# Altium PCB PCB.PCBDOC (part 2 of 3)
Units mil, origin at the board's own origin, x right, y up, seen from the top; angles counter-clockwise.
Board outline 2850 x 2710 mil, 2 copper layers (Top Layer, Bottom Layer); 25 components, 0 nets, 106 pads, 0 vias.
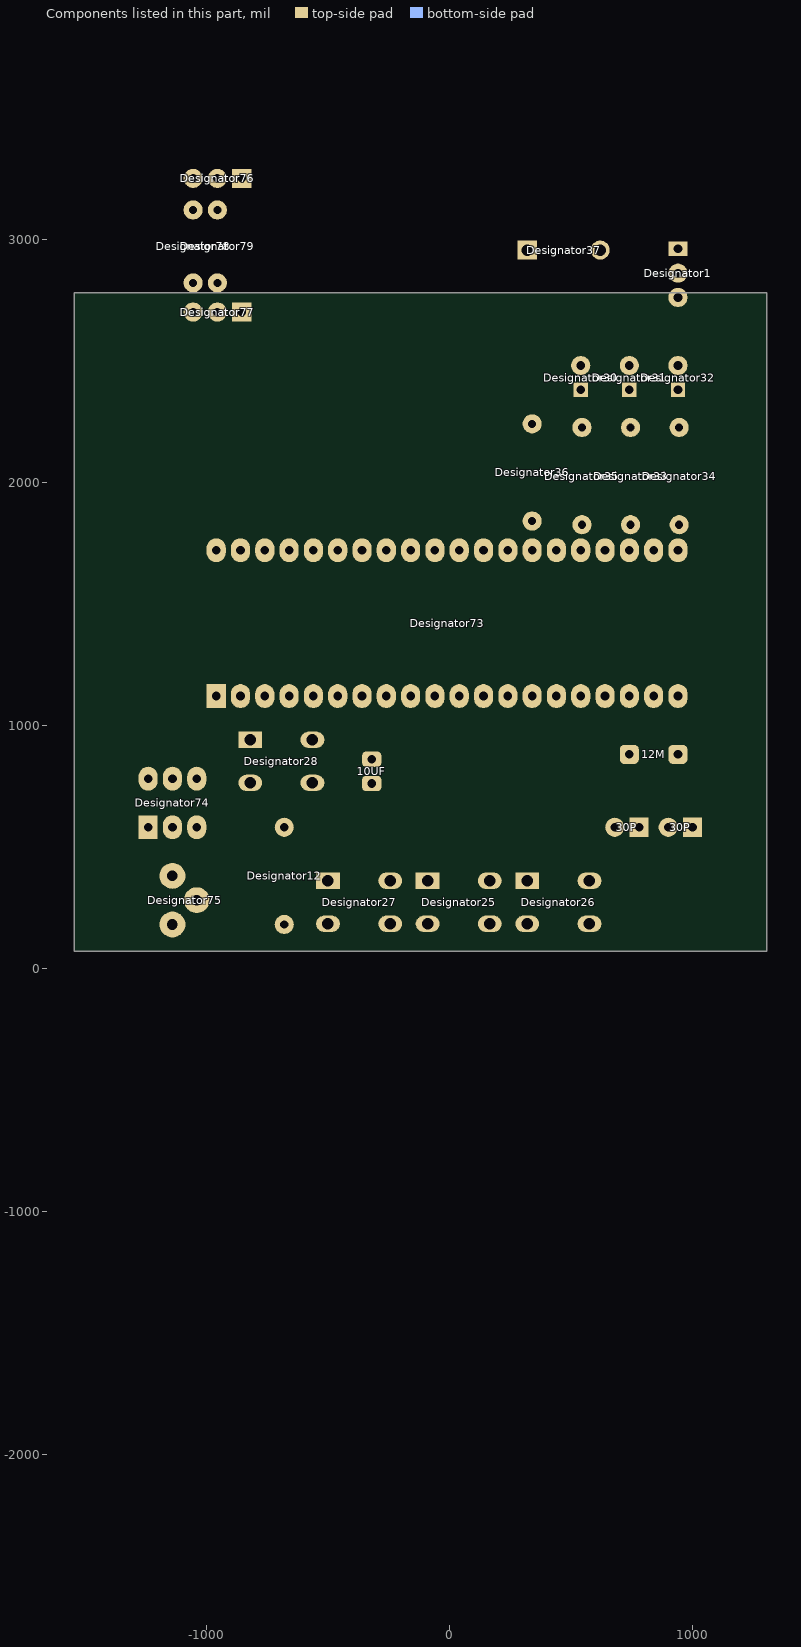
[diagram p2: the components of this part, seen from the top]

## Nets (pads, with @x,y where several pads share a name; then routed paths per layer and width w, separated by ;. In a path a pad name is that pad's centre, name@x,y a point inside that pad or via, vN(x,y) a via of type N, cw(c..) or ccw(c..) an arc to the next point about the centre after c; other vN are vias at no path point) (continued)
copper on no net: (continued)
  Bottom Layer w1: -182,-2566 -158,-2566 ; -181,-2567 -158,-2567 ; -181,-2565 -157,-2565 ; -180,-2568 -159,-2568 ; -180,-2564 -157,-2564 ; -180,-2563 -156,-2563 ; -179,-2569 -159,-2569 ; -179,-2562 -155,-2562 ; -178,-2570 -160,-2570 ; -178,-2561 -155,-2561 ; -177,-2571 -161,-2571 ; -177,-2560 -154,-2560 ; -177,-2559 -154,-2559 ; -176,-2572 -161,-2572 ; -176,-2558 -153,-2558 ; -175,-2573 -162,-2573 ; -175,-2557 -153,-2557 ; -175,-2556 -152,-2556 ; -174,-2575 -164,-2575 ; -174,-2574 -163,-2574 ; -174,-2555 -152,-2555 ; -173,-2576 -164,-2576 ; -173,-2554 -151,-2554 ; -173,-2553 -151,-2553 ; -172,-2577 -165,-2577 ; -172,-2552 -151,-2552 ; -172,-2551 -150,-2551 ; -171,-2578 -166,-2578 ; -171,-2550 -150,-2550 ; -171,-2549 -149,-2549 ; -170,-2580 -167,-2580 ; -170,-2579 -167,-2579 ; -170,-2548 -149,-2548 ; -170,-2547 -148,-2547 ; -169,-2581 -168,-2581 ; -169,-2546 -148,-2546 ; -169,-2545 -148,-2545 ; -168,-2544 -147,-2544 ; -168,-2543 -147,-2543 ; -167,-2542 -147,-2542 ; -167,-2541 -146,-2541 ; -166,-2540 -146,-2540 ; -166,-2539 -146,-2539 ; -166,-2538 -145,-2538 ; -165,-2537 -145,-2537 ; -165,-2536 -145,-2536 ; -165,-2535 -144,-2535 ; -164,-2534 -144,-2534 ; -164,-2533 -144,-2533 ; -163,-2532 -143,-2532 ; -163,-2531 -143,-2531 ; -163,-2530 -143,-2530 ; -163,-2529 -143,-2529 ; -162,-2528 -142,-2528 ; -162,-2527 -142,-2527 ; -162,-2526 -142,-2526 ; -161,-2525 -142,-2525 ; -161,-2524 -141,-2524 ; -161,-2523 -141,-2523 ; -161,-2522 -141,-2522 ; -160,-2521 -141,-2521 ; -160,-2520 -140,-2520 ; -160,-2519 -140,-2519 ; -160,-2518 -140,-2518 ; -159,-2517 -140,-2517 ; -159,-2516 -140,-2516 ; -159,-2515 -139,-2515 ; -159,-2514 -139,-2514 ; -159,-2513 -139,-2513 ; -158,-2512 -139,-2512 ; -158,-2511 -139,-2511 ; -158,-2510 -138,-2510 ; -158,-2509 -138,-2509 ; -158,-2508 -138,-2508 ; -157,-2507 -138,-2507 ; -157,-2506 -138,-2506 ; -157,-2505 -138,-2505 ; -157,-2504 -137,-2504 ; -157,-2503 -137,-2503 ; -157,-2502 -137,-2502 ; -157,-2501 -137,-2501 ; -156,-2500 -137,-2500 ; -156,-2499 -137,-2499 ; -156,-2498 -137,-2498 ; -156,-2497 -137,-2497 ; -156,-2496 -136,-2496 ; -156,-2495 -136,-2495 ; -156,-2494 -136,-2494 ; -156,-2493 -136,-2493 ; -155,-2492 -136,-2492 ; -155,-2491 -136,-2491 ; -155,-2490 -136,-2490 ; -155,-2489 -136,-2489 ; -155,-2488 -136,-2488 ; -155,-2487 -136,-2487 ; -155,-2486 -135,-2486 ; -155,-2485 -135,-2485 ; -155,-2484 -135,-2484 ; -155,-2483 -135,-2483 ; -155,-2482 -135,-2482 ; -155,-2481 -135,-2481 ; -154,-2480 -135,-2480 ; -154,-2479 -135,-2479 ; -154,-2478 -135,-2478 ; -154,-2477 -135,-2477 ; -154,-2476 -135,-2476 ; -154,-2475 -135,-2475 ; -154,-2474 -135,-2474 ; -154,-2473 -135,-2473 ; -154,-2472 -135,-2472 ; -154,-2471 -135,-2471 ; -154,-2470 -135,-2470 ; -154,-2469 -134,-2469 ; -154,-2468 -134,-2468 ; -154,-2467 -134,-2467 ; -154,-2466 -134,-2466 ; -154,-2465 -134,-2465 ; -154,-2464 -134,-2464 ; -154,-2463 -134,-2463 ; -154,-2462 -134,-2462 ; -154,-2461 -134,-2461 ; -154,-2460 -134,-2460 ; -154,-2459 -134,-2459 ; -154,-2458 -134,-2458 ; -154,-2457 -134,-2457 ; -154,-2456 -134,-2456 ; -154,-2455 -134,-2455 ; -154,-2454 -134,-2454 ; -154,-2453 -134,-2453 ; -154,-2452 -134,-2452 ; -154,-2451 -134,-2451 ; -154,-2450 -134,-2450 ; -154,-2449 -134,-2449 ; -154,-2448 -134,-2448 ; -154,-2447 -134,-2447 ; -154,-2446 -134,-2446 ; -154,-2445 -134,-2445 ; -154,-2444 -134,-2444 ; -154,-2443 -134,-2443 ; -154,-2442 -134,-2442 ; -154,-2441 -134,-2441 ; -154,-2440 -134,-2440 ; -154,-2439 -134,-2439 ; -154,-2438 -134,-2438 ; -154,-2437 -134,-2437 ; -154,-2436 -134,-2436 ; -154,-2435 -134,-2435 ; -154,-2434 -134,-2434 ; -154,-2433 -134,-2433 ; -154,-2432 -134,-2432 ; -154,-2431 -134,-2431 ; -154,-2430 -134,-2430 ; -154,-2429 -134,-2429 ; -154,-2428 -134,-2428 ; -154,-2427 -134,-2427 ; -154,-2426 -134,-2426 ; -154,-2425 -134,-2425 ; -154,-2424 -134,-2424 ; -154,-2423 -134,-2423 ; -154,-2422 -134,-2422 ; -154,-2421 -134,-2421 ; -154,-2420 -134,-2420 ; -154,-2419 -134,-2419 ; -154,-2418 -134,-2418 ; -154,-2417 -134,-2417 ; -154,-2416 -134,-2416 ; -154,-2415 -134,-2415 ; -154,-2414 -134,-2414 ; -154,-2413 -134,-2413 ; -154,-2412 -134,-2412 ; -154,-2411 -134,-2411 ; -154,-2410 -134,-2410 ; -154,-2409 -134,-2409 ; -154,-2408 -134,-2408 ; -154,-2407 -134,-2407 ; -154,-2406 -134,-2406 ; -154,-2405 -134,-2405 ; -154,-2404 -134,-2404 ; -154,-2403 -134,-2403 ; -154,-2402 -134,-2402 ; -154,-2401 -134,-2401 ; -154,-2400 48,-2400 ; -154,-2399 48,-2399 ; -154,-2398 48,-2398 ; -154,-2397 48,-2397 ; -154,-2396 48,-2396 ; -154,-2395 48,-2395 ; -154,-2394 48,-2394 ; -154,-2393 48,-2393 ; -154,-2392 48,-2392 ; -154,-2391 48,-2391 ; -154,-2390 48,-2390 ; -154,-2389 48,-2389 ; -154,-2388 48,-2388 ; -154,-2387 48,-2387 ; -154,-2386 48,-2386 ; -154,-2385 48,-2385 ; -154,-2384 48,-2384 ; -154,-2383 48,-2383 ; -136,-2568 51,-2568 ; -136,-2567 51,-2567 ; -136,-2566 51,-2566 ; -136,-2565 51,-2565 ; -136,-2564 51,-2564 ; -136,-2563 51,-2563 ; -136,-2562 51,-2562 ; -136,-2561 51,-2561 ; -136,-2560 51,-2560 ; -136,-2559 51,-2559 ; -136,-2558 51,-2558 ; -136,-2557 51,-2557 ; -136,-2556 51,-2556 ; -136,-2555 51,-2555 ; -136,-2554 51,-2554 ; -136,-2553 51,-2553 ; -136,-2552 51,-2552 ; -136,-2551 51,-2551 ; -123,-2436 -103,-2436 ; -122,-2440 -102,-2440 ; -122,-2439 -102,-2439 ; -122,-2438 -102,-2438 ; -122,-2437 -103,-2437 ; -121,-2443 -101,-2443 ; -121,-2442 -101,-2442 ; -121,-2441 -101,-2441 ; -121,-2435 -103,-2435 ; -120,-2446 -100,-2446 ; -120,-2445 -100,-2445 ; -120,-2444 -100,-2444 ; -119,-2450 -99,-2450 ; -119,-2449 -99,-2449 ; -119,-2448 -99,-2448 ; -119,-2447 -100,-2447 ; -118,-2453 -98,-2453 ; -118,-2452 -98,-2452 ; -118,-2451 -98,-2451 ; -118,-2434 -104,-2434 ; -117,-2456 -97,-2456 ; -117,-2455 -97,-2455 ; -117,-2454 -97,-2454 ; -116,-2460 -95,-2460 ; -116,-2459 -96,-2459 ; -116,-2458 -96,-2458 ; -116,-2457 -96,-2457 ; -115,-2463 -95,-2463 ; -115,-2462 -95,-2462 ; -115,-2461 -95,-2461 ; -115,-2433 -104,-2433 ; -114,-2467 -93,-2467 ; -114,-2466 -94,-2466 ; -114,-2465 -94,-2465 ; -114,-2464 -94,-2464 ; -113,-2470 -92,-2470 ; -113,-2469 -93,-2469 ; -113,-2468 -93,-2468 ; -112,-2474 -91,-2474 ; -112,-2473 -92,-2473 ; -112,-2472 -92,-2472 ; -112,-2471 -92,-2471 ; -112,-2432 -104,-2432 ; -111,-2478 -90,-2478 ; -111,-2477 -90,-2477 ; -111,-2476 -91,-2476 ; -111,-2475 -91,-2475 ; -110,-2481 -89,-2481 ; -110,-2480 -89,-2480 ; -110,-2479 -90,-2479 ; -109,-2485 -88,-2485 ; -109,-2484 -88,-2484 ; -109,-2483 -89,-2483 ; -109,-2482 -89,-2482 ; -109,-2431 -105,-2431 ; -108,-2489 -87,-2489 ; -108,-2488 -87,-2488 ; -108,-2487 -87,-2487 ; -108,-2486 -88,-2486 ; -107,-2492 -86,-2492 ; -107,-2491 -86,-2491 ; -107,-2490 -87,-2490 ; -107,-2430 -105,-2430 ; -106,-2496 -85,-2496 ; -106,-2495 -85,-2495 ; -106,-2494 -86,-2494 ; -106,-2493 -86,-2493 ; -105,-2500 -84,-2500 ; -105,-2499 -84,-2499 ; -105,-2498 -84,-2498 ; -105,-2497 -85,-2497 ; -104,-2504 -83,-2504 ; -104,-2503 -83,-2503 ; -104,-2502 -83,-2502 ; -104,-2501 -84,-2501 ; -103,-2508 -82,-2508 ; -103,-2507 -82,-2507 ; -103,-2506 -82,-2506 ; -103,-2505 -83,-2505 ; -102,-2512 -81,-2512 ; -102,-2511 -81,-2511 ; -102,-2510 -81,-2510 ; -102,-2509 -81,-2509 ; -101,-2516 -80,-2516 ; -101,-2515 -80,-2515 ; -101,-2514 -80,-2514 ; -101,-2513 -80,-2513 ; -100,-2520 -79,-2520 ; -100,-2519 -79,-2519 ; -100,-2518 -79,-2518 ; -100,-2517 -79,-2517 ; -99,-2524 -78,-2524 ; -99,-2523 -78,-2523 ; -99,-2522 -78,-2522 ; -99,-2521 -78,-2521 ; -98,-2528 -86,-2528 ; -98,-2527 -82,-2527 ; -98,-2526 -79,-2526 ; -98,-2525 -77,-2525 ; -97,-2531 -95,-2531 ; -97,-2530 -92,-2530 ; -97,-2529 -89,-2529 ; -71,-2359 -47,-2359 ; -71,-2358 -48,-2358 ; -70,-2360 -46,-2360 ; -70,-2357 -48,-2357 ; -69,-2361 -46,-2361 ; -69,-2356 -49,-2356 ; -68,-2363 -44,-2363 ; -68,-2362 -45,-2362 ; -67,-2364 -43,-2364 ; -67,-2355 -50,-2355 ; -66,-2427 -46,-2427 ; -66,-2426 -46,-2426 ; -66,-2425 -47,-2425 ; -66,-2424 -47,-2424 ; -66,-2366 -42,-2366 ; -66,-2365 -43,-2365 ; -65,-2431 -45,-2431 ; -65,-2430 -45,-2430 ; -65,-2429 -46,-2429 ; -65,-2428 -46,-2428 ; -65,-2367 -41,-2367 ; -65,-2354 -51,-2354 ; -64,-2435 -44,-2435 ; -64,-2434 -44,-2434 ; -64,-2433 -45,-2433 ; -64,-2432 -45,-2432 ; -64,-2423 -47,-2423 ; -64,-2368 -41,-2368 ; -63,-2439 -43,-2439 ; -63,-2438 -43,-2438 ; -63,-2437 -43,-2437 ; -63,-2436 -44,-2436 ; -63,-2370 -39,-2370 ; -63,-2369 -40,-2369 ; -63,-2353 -51,-2353 ; -62,-2444 -42,-2444 ; -62,-2443 -42,-2443 ; -62,-2442 -42,-2442 ; -62,-2441 -42,-2441 ; -62,-2440 -43,-2440 ; -62,-2371 -39,-2371 ; -61,-2448 -41,-2448 ; -61,-2447 -41,-2447 ; -61,-2446 -41,-2446 ; -61,-2445 -41,-2445 ; -61,-2422 -48,-2422 ; -61,-2373 -37,-2373 ; -61,-2372 -38,-2372 ; -61,-2352 -52,-2352 ; -60,-2452 -40,-2452 ; -60,-2451 -40,-2451 ; -60,-2450 -40,-2450 ; -60,-2449 -40,-2449 ; -60,-2375 -36,-2375 ; -60,-2374 -37,-2374 ; -59,-2457 -38,-2457 ; -59,-2456 -39,-2456 ; -59,-2455 -39,-2455 ; -59,-2454 -39,-2454 ; -59,-2453 -39,-2453 ; -59,-2376 -36,-2376 ; -59,-2351 -53,-2351 ; -58,-2462 -37,-2462 ; -58,-2461 -38,-2461 ; -58,-2460 -38,-2460 ; -58,-2459 -38,-2459 ; -58,-2458 -38,-2458 ; -58,-2378 -39,-2378 ; -58,-2377 -37,-2377 ; -57,-2466 -36,-2466 ; -57,-2465 -37,-2465 ; -57,-2464 -37,-2464 ; -57,-2463 -37,-2463 ; -57,-2421 -48,-2421 ; -57,-2379 -41,-2379 ; -57,-2350 -54,-2350 ; -56,-2471 -35,-2471 ; -56,-2470 -36,-2470 ; -56,-2469 -36,-2469 ; -56,-2468 -36,-2468 ; -56,-2467 -36,-2467 ; -56,-2381 -44,-2381 ; -56,-2380 -43,-2380 ; -56,-2349 -54,-2349 ; -55,-2476 -34,-2476 ; -55,-2475 -34,-2475 ; -55,-2474 -35,-2474 ; -55,-2473 -35,-2473 ; -55,-2472 -35,-2472 ; -55,-2382 -46,-2382 ; -54,-2482 -33,-2482 ; -54,-2481 -33,-2481 ; -54,-2480 -33,-2480 ; -54,-2479 -34,-2479 ; -54,-2478 -34,-2478 ; -54,-2477 -34,-2477 ; -54,-2420 -48,-2420 ; -53,-2487 -32,-2487 ; -53,-2486 -32,-2486 ; -53,-2485 -32,-2485 ; -53,-2484 -33,-2484 ; -53,-2483 -33,-2483 ; -52,-2493 -31,-2493 ; -52,-2492 -31,-2492 ; -52,-2491 -31,-2491 ; -52,-2490 -31,-2490 ; -52,-2489 -32,-2489 ; -52,-2488 -32,-2488 ; -51,-2498 -30,-2498 ; -51,-2497 -30,-2497 ; -51,-2496 -30,-2496 ; -51,-2495 -30,-2495 ; -51,-2494 -31,-2494 ; -50,-2504 -29,-2504 ; -50,-2503 -29,-2503 ; -50,-2502 -29,-2502 ; -50,-2501 -29,-2501 ; -50,-2500 -29,-2500 ; -50,-2499 -30,-2499 ; -50,-2419 -48,-2419 ; -49,-2511 -27,-2511 ; -49,-2510 -28,-2510 ; -49,-2509 -28,-2509 ; -49,-2508 -28,-2508 ; -49,-2507 -28,-2507 ; -49,-2506 -28,-2506 ; -49,-2505 -28,-2505 ; -48,-2517 -42,-2517 ; -48,-2516 -38,-2516 ; -48,-2515 -34,-2515 ; -48,-2514 -30,-2514 ; -48,-2513 -27,-2513 ; -48,-2512 -27,-2512 ; -47,-2518 -46,-2518 ; -27,-2550 -7,-2550 ; -27,-2549 -7,-2549 ; -26,-2548 -6,-2548 ; -26,-2547 -6,-2547 ; -26,-2546 -6,-2546 ; -25,-2545 -5,-2545 ; -25,-2544 -5,-2544 ; -25,-2543 -5,-2543 ; -24,-2542 -4,-2542 ; -24,-2541 -4,-2541 ; -23,-2540 -3,-2540 ; -23,-2539 -3,-2539 ; -23,-2538 -3,-2538 ; -22,-2537 -2,-2537 ; -22,-2536 -2,-2536 ; -22,-2535 -2,-2535 ; -21,-2534 -1,-2534 ; -21,-2533 -1,-2533 ; -21,-2532 -1,-2532 ; -20,-2531 0,-2531 ; -20,-2530 0,-2530 ; -19,-2529 0,-2529 ; -19,-2528 1,-2528 ; -19,-2527 1,-2527 ; -18,-2526 2,-2526 ; -18,-2525 2,-2525 ; -18,-2524 2,-2524 ; -17,-2523 3,-2523 ; -17,-2522 3,-2522 ; -17,-2521 3,-2521 ; -16,-2520 4,-2520 ; -16,-2519 4,-2519 ; -16,-2518 4,-2518 ; -15,-2517 5,-2517 ; -15,-2516 5,-2516 ; -15,-2515 5,-2515 ; -14,-2514 6,-2514 ; -14,-2513 6,-2513 ; -14,-2512 6,-2512 ; -13,-2511 7,-2511 ; -13,-2510 7,-2510 ; -13,-2509 7,-2509 ; -12,-2508 8,-2508 ; -12,-2507 8,-2507 ; -12,-2506 8,-2506 ; -12,-2505 9,-2505 ; -11,-2504 9,-2504 ; -11,-2503 9,-2503 ; -11,-2502 10,-2502 ; -10,-2501 10,-2501 ; -10,-2500 10,-2500 ; -10,-2499 11,-2499 ; -9,-2498 11,-2498 ; -9,-2497 11,-2497 ; -9,-2496 11,-2496 ; -8,-2495 12,-2495 ; -8,-2494 12,-2494 ; -8,-2493 12,-2493 ; -7,-2492 13,-2492 ; -7,-2491 13,-2491 ; -7,-2490 13,-2490 ; -7,-2489 14,-2489 ; -6,-2488 14,-2488 ; -6,-2487 14,-2487 ; -6,-2486 15,-2486 ; -5,-2485 15,-2485 ; -5,-2484 15,-2484 ; -5,-2483 16,-2483 ; -5,-2482 16,-2482 ; -4,-2481 16,-2481 ; -4,-2480 16,-2480 ; -4,-2479 17,-2479 ; -3,-2478 17,-2478 ; -3,-2477 17,-2477 ; -3,-2476 18,-2476 ; -2,-2475 18,-2475 ; -2,-2474 18,-2474 ; -2,-2473 19,-2473 ; -2,-2472 19,-2472 ; -1,-2471 19,-2471 ; -1,-2470 20,-2470 ; -1,-2469 20,-2469 ; -1,-2468 20,-2468 ; 0,-2467 20,-2467 ; 0,-2466 21,-2466 ; 0,-2465 21,-2465 ; 1,-2464 21,-2464 ; 1,-2463 22,-2463 ; 1,-2462 22,-2462 ; 1,-2461 22,-2461 ; 2,-2460 23,-2460 ; 2,-2459 23,-2459 ; 2,-2458 23,-2458 ; 3,-2457 23,-2457 ; 3,-2456 24,-2456 ; 3,-2455 24,-2455 ; 3,-2454 24,-2454 ; 4,-2453 25,-2453 ; 4,-2452 25,-2452 ; 4,-2451 25,-2451 ; 4,-2450 26,-2450 ; 5,-2449 26,-2449 ; 5,-2448 26,-2448 ; 5,-2447 26,-2447 ; 6,-2446 27,-2446 ; 6,-2445 27,-2445 ; 6,-2444 27,-2444 ; 6,-2443 28,-2443 ; 7,-2442 28,-2442 ; 7,-2441 28,-2441 ; 7,-2440 28,-2440 ; 7,-2439 29,-2439 ; 8,-2438 29,-2438 ; 8,-2437 29,-2437 ; 8,-2436 30,-2436 ; 8,-2435 30,-2435 ; 9,-2434 30,-2434 ; 9,-2433 30,-2433 ; 9,-2432 31,-2432 ; 9,-2431 31,-2431 ; 10,-2430 31,-2430 ; 10,-2429 32,-2429 ; 10,-2428 31,-2428 ; 10,-2427 28,-2427 ; 11,-2426 24,-2426 ; 11,-2425 21,-2425 ; 11,-2424 17,-2424 ; 12,-2423 13,-2423 ; 63,-2568 86,-2568 ; 63,-2567 87,-2567 ; 64,-2569 86,-2569 ; 64,-2566 87,-2566 ; 64,-2565 88,-2565 ; 65,-2570 85,-2570 ; 65,-2564 88,-2564 ; 66,-2572 84,-2572 ; 66,-2571 85,-2571 ; 66,-2563 89,-2563 ; 66,-2562 89,-2562 ; 67,-2573 83,-2573 ; 67,-2561 90,-2561 ; 68,-2574 83,-2574 ; 68,-2560 90,-2560 ; 68,-2559 91,-2559 ; 69,-2575 82,-2575 ; 69,-2558 91,-2558 ; 69,-2557 92,-2557 ; 70,-2576 81,-2576 ; 70,-2556 92,-2556 ; 70,-2555 92,-2555 ; 71,-2577 81,-2577 ; 71,-2554 93,-2554 ; 71,-2553 93,-2553 ; 72,-2578 80,-2578 ; 72,-2552 94,-2552 ; 72,-2551 94,-2551 ; 73,-2580 79,-2580 ; 73,-2579 79,-2579 ; 73,-2550 94,-2550 ; 73,-2549 95,-2549 ; 74,-2581 78,-2581 ; 74,-2548 95,-2548 ; 74,-2547 95,-2547 ; 75,-2582 77,-2582 ; 75,-2546 96,-2546 ; 75,-2545 96,-2545 ; 76,-2583 77,-2583 ; 76,-2544 96,-2544 ; 76,-2543 97,-2543 ; 76,-2542 97,-2542 ; 77,-2541 97,-2541 ; 77,-2540 98,-2540 ; 78,-2539 98,-2539 ; 78,-2538 98,-2538 ; 78,-2537 99,-2537 ; 79,-2536 99,-2536 ; 79,-2535 99,-2535 ; 79,-2534 99,-2534 ; 80,-2533 100,-2533 ; 80,-2532 100,-2532 ; 80,-2531 100,-2531 ; 81,-2530 100,-2530 ; 81,-2529 101,-2529 ; 81,-2528 101,-2528 ; 81,-2527 101,-2527 ; 82,-2526 101,-2526 ; 82,-2525 101,-2525 ; 82,-2524 102,-2524 ; 82,-2523 102,-2523 ; 83,-2522 102,-2522 ; 83,-2521 102,-2521 ; 83,-2520 102,-2520 ; 83,-2519 103,-2519 ; 83,-2518 103,-2518 ; 84,-2517 103,-2517 ; 84,-2516 103,-2516 ; 84,-2515 103,-2515 ; 84,-2514 103,-2514 ; 84,-2513 103,-2513 ; 84,-2512 104,-2512 ; 85,-2511 104,-2511 ; 85,-2510 104,-2510 ; 85,-2509 104,-2509 ; 85,-2508 104,-2508 ; 85,-2507 104,-2507 ; 85,-2506 104,-2506 ; 85,-2505 104,-2505 ; 86,-2504 104,-2504 ; 86,-2503 104,-2503 ; 86,-2502 279,-2502 ; 86,-2501 279,-2501 ; 86,-2500 279,-2500 ; 86,-2499 279,-2499 ; 86,-2498 279,-2498 ; 86,-2497 279,-2497 ; 86,-2496 279,-2496 ; 87,-2495 279,-2495 ; 87,-2494 279,-2494 ; 87,-2493 279,-2493 ; 87,-2492 279,-2492 ; 87,-2491 279,-2491 ; 87,-2490 279,-2490 ; 87,-2489 279,-2489 ; 87,-2488 279,-2488 ; 87,-2487 279,-2487 ; 87,-2486 279,-2486 ; 87,-2485 106,-2485 ; 87,-2484 106,-2484 ; 87,-2483 106,-2483 ; 87,-2482 106,-2482 ; 87,-2481 106,-2481 ; 88,-2480 106,-2480 ; 88,-2479 106,-2479 ; 88,-2478 106,-2478 ; 88,-2477 106,-2477 ; 88,-2476 106,-2476 ; 88,-2475 107,-2475 ; 88,-2474 107,-2474 ; 88,-2473 107,-2473 ; 88,-2472 107,-2472 ; 88,-2471 107,-2471 ; 88,-2470 107,-2470 ; 88,-2469 107,-2469 ; 88,-2468 107,-2468 ; 88,-2467 107,-2467 ; 88,-2466 107,-2466 ; 88,-2465 107,-2465 ; 88,-2464 107,-2464 ; 88,-2463 107,-2463 ; 88,-2462 107,-2462 ; 88,-2461 107,-2461 ; 88,-2460 107,-2460 ; 88,-2459 107,-2459 ; 88,-2458 107,-2458 ; 88,-2457 107,-2457 ; 88,-2456 107,-2456 ; 88,-2455 107,-2455 ; 88,-2454 107,-2454 ; 88,-2453 107,-2453 ; 88,-2452 107,-2452 ; 88,-2451 107,-2451 ; 88,-2450 107,-2450 ; 88,-2449 107,-2449 ; 88,-2448 107,-2448 ; 88,-2447 107,-2447 ; 88,-2446 107,-2446 ; 88,-2445 107,-2445 ; 88,-2444 107,-2444 ; 88,-2443 107,-2443 ; 88,-2442 107,-2442 ; 88,-2441 279,-2441 ; 88,-2440 279,-2440 ; 88,-2439 279,-2439 ; 88,-2438 279,-2438 ; 88,-2437 279,-2437 ; 88,-2436 279,-2436 ; 88,-2435 279,-2435 ; 88,-2434 279,-2434 ; 88,-2433 279,-2433 ; 88,-2432 279,-2432 ; 88,-2431 279,-2431 ; 88,-2430 279,-2430 ; 88,-2429 279,-2429 ; 88,-2428 279,-2428 ; 88,-2427 279,-2427 ; 88,-2426 279,-2426 ; 88,-2425 279,-2425 ; 88,-2424 107,-2424 ; 88,-2423 107,-2423 ; 88,-2422 107,-2422 ; 88,-2421 107,-2421 ; 88,-2420 107,-2420 ; 88,-2419 107,-2419 ; 88,-2418 107,-2418 ; 88,-2417 107,-2417 ; 88,-2416 107,-2416 ; 88,-2415 107,-2415 ; 88,-2414 107,-2414 ; 88,-2413 107,-2413 ; 88,-2412 107,-2412 ; 88,-2411 107,-2411 ; 88,-2410 107,-2410 ; 88,-2409 107,-2409 ; 88,-2408 107,-2408 ; 88,-2407 107,-2407 ; 88,-2406 107,-2406 ; 88,-2405 107,-2405 ; 88,-2404 107,-2404 ; 88,-2403 107,-2403 ; 88,-2402 107,-2402 ; 88,-2401 107,-2401 ; 88,-2400 107,-2400 ; 88,-2399 107,-2399 ; 88,-2398 107,-2398 ; 88,-2397 107,-2397 ; 88,-2396 107,-2396 ; 88,-2395 107,-2395 ; 88,-2394 107,-2394 ; 88,-2393 107,-2393 ; 88,-2392 107,-2392 ; 88,-2391 107,-2391 ; 88,-2390 107,-2390 ; 88,-2389 107,-2389 ; 88,-2388 107,-2388 ; 88,-2387 107,-2387 ; 88,-2386 107,-2386 ; 88,-2385 107,-2385 ; 88,-2384 107,-2384 ; 88,-2383 107,-2383 ; 88,-2382 107,-2382 ; 88,-2381 107,-2381 ; 88,-2380 279,-2380 ; 88,-2379 279,-2379 ; 88,-2378 279,-2378 ; 88,-2377 279,-2377 ; 88,-2376 279,-2376 ; 88,-2375 279,-2375 ; 88,-2374 279,-2374 ; 88,-2373 279,-2373 ; 88,-2372 279,-2372 ; 88,-2371 279,-2371 ; 88,-2370 279,-2370 ; 88,-2369 279,-2369 ; 88,-2368 279,-2368 ; 88,-2367 279,-2367 ; 88,-2366 279,-2366 ; 88,-2365 279,-2365 ; 88,-2364 279,-2364 ; 173,-2577 191,-2577 ; 173,-2576 191,-2576 ; 173,-2575 191,-2575 ; 173,-2574 191,-2574 ; 173,-2573 191,-2573 ; 173,-2572 191,-2572 ; 173,-2571 191,-2571 ; 173,-2570 191,-2570 ; 173,-2569 191,-2569 ; 173,-2568 191,-2568 ; 173,-2567 191,-2567 ; 173,-2566 191,-2566 ; 173,-2565 191,-2565 ; 173,-2564 191,-2564 ; 173,-2563 191,-2563 ; 173,-2562 191,-2562 ; 173,-2561 191,-2561 ; 173,-2560 191,-2560 ; 173,-2559 191,-2559 ; 173,-2558 191,-2558 ; 173,-2557 191,-2557 ; 173,-2556 191,-2556 ; 173,-2555 191,-2555 ; 173,-2554 191,-2554 ; 173,-2553 191,-2553 ; 173,-2552 191,-2552 ; 173,-2551 191,-2551 ; 173,-2550 191,-2550 ; 173,-2549 191,-2549 ; 173,-2548 191,-2548 ; 173,-2547 191,-2547 ; 173,-2546 191,-2546 ; 173,-2545 191,-2545 ; 173,-2544 191,-2544 ; 173,-2543 191,-2543 ; 173,-2542 191,-2542 ; 173,-2541 191,-2541 ; 173,-2540 191,-2540 ; 173,-2539 191,-2539 ; 173,-2538 191,-2538 ; 173,-2537 191,-2537 ; 173,-2536 191,-2536 ; 173,-2535 191,-2535 ; 173,-2534 191,-2534 ; 173,-2533 191,-2533 ; 173,-2532 191,-2532 ; 173,-2531 191,-2531 ; 173,-2530 191,-2530 ; 173,-2529 191,-2529 ; 173,-2528 191,-2528 ; 173,-2527 191,-2527 ; 173,-2526 191,-2526 ; 173,-2525 191,-2525 ; 173,-2524 191,-2524 ; 173,-2523 191,-2523 ; 173,-2522 191,-2522 ; 173,-2521 191,-2521 ; 173,-2520 191,-2520 ; 173,-2519 191,-2519 ; 173,-2518 191,-2518 ; 173,-2517 191,-2517 ; 173,-2516 191,-2516 ; 173,-2515 191,-2515 ; 173,-2514 191,-2514 ; 173,-2513 191,-2513 ; 173,-2512 191,-2512 ; 173,-2511 191,-2511 ; 173,-2510 191,-2510 ; 173,-2509 191,-2509 ; 173,-2508 191,-2508 ; 173,-2507 191,-2507 ; 173,-2506 191,-2506 ; 173,-2505 191,-2505 ; 173,-2504 191,-2504 ; 173,-2503 191,-2503 ; 173,-2485 191,-2485 ; 173,-2484 191,-2484 ; 173,-2483 191,-2483 ; 173,-2482 191,-2482 ; 173,-2481 191,-2481 ; 173,-2480 191,-2480 ; 173,-2479 191,-2479 ; 173,-2478 191,-2478 ; 173,-2477 191,-2477 ; 173,-2476 191,-2476 ; 173,-2475 191,-2475 ; 173,-2474 191,-2474 ; 173,-2473 191,-2473 ; 173,-2472 191,-2472 ; 173,-2471 191,-2471 ; 173,-2470 191,-2470 ; 173,-2469 191,-2469 ; 173,-2468 191,-2468 ; 173,-2467 191,-2467 ; 173,-2466 191,-2466 ; 173,-2465 191,-2465 ; 173,-2464 191,-2464 ; 173,-2463 191,-2463 ; 173,-2462 191,-2462 ; 173,-2461 191,-2461 ; 173,-2460 191,-2460 ; 173,-2459 191,-2459 ; 173,-2458 191,-2458 ; 173,-2457 191,-2457 ; 173,-2456 191,-2456 ; 173,-2455 191,-2455 ; 173,-2454 191,-2454 ; 173,-2453 191,-2453 ; 173,-2452 191,-2452 ; 173,-2451 191,-2451 ; 173,-2450 191,-2450 ; 173,-2449 191,-2449 ; 173,-2448 191,-2448 ; 173,-2447 191,-2447 ; 173,-2446 191,-2446 ; 173,-2445 191,-2445 ; 173,-2444 191,-2444 ; 173,-2443 191,-2443 ; 173,-2442 191,-2442 ; 173,-2424 191,-2424 ; 173,-2423 191,-2423 ; 173,-2422 191,-2422 ; 173,-2421 191,-2421 ; 173,-2420 191,-2420 ; 173,-2419 191,-2419 ; 173,-2418 191,-2418 ; 173,-2417 191,-2417 ; 173,-2416 191,-2416 ; 173,-2415 191,-2415 ; 173,-2414 191,-2414 ; 173,-2413 191,-2413 ; 173,-2412 191,-2412 ; 173,-2411 191,-2411 ; 173,-2410 191,-2410 ; 173,-2409 191,-2409 ; 173,-2408 191,-2408 ; 173,-2407 191,-2407 ; 173,-2406 191,-2406 ; 173,-2405 191,-2405 ; 173,-2404 191,-2404 ; 173,-2403 191,-2403 ; 173,-2402 191,-2402 ; 173,-2401 191,-2401 ; 173,-2400 191,-2400 ; 173,-2399 191,-2399 ; 173,-2398 191,-2398 ; 173,-2397 191,-2397 ; 173,-2396 191,-2396 ; 173,-2395 191,-2395 ; 173,-2394 191,-2394 ; 173,-2393 191,-2393 ; 173,-2392 191,-2392 ; 173,-2391 191,-2391 ; 173,-2390 191,-2390 ; 173,-2389 191,-2389 ; 173,-2388 191,-2388 ; 173,-2387 191,-2387 ; 173,-2386 191,-2386 ; 173,-2385 191,-2385 ; 173,-2384 191,-2384 ; 173,-2383 191,-2383 ; 173,-2382 191,-2382 ; 173,-2381 191,-2381 ; 213,-2561 278,-2561 ; 213,-2560 278,-2560 ; 213,-2559 224,-2559 ; 214,-2566 276,-2566 ; 214,-2565 277,-2565 ; 214,-2564 277,-2564 ; 214,-2563 277,-2563 ; 214,-2562 278,-2562 ; 215,-2571 273,-2571 ; 215,-2570 274,-2570 ; 215,-2569 274,-2569 ; 215,-2568 275,-2568 ; 215,-2567 276,-2567 ; 216,-2577 263,-2577 ; 216,-2576 266,-2576 ; 216,-2575 268,-2575 ; 216,-2574 270,-2574 ; 216,-2573 271,-2573 ; 216,-2572 272,-2572 ; 228,-2578 259,-2578 ; 251,-2559 278,-2559 ; 254,-2558 279,-2558 ; 256,-2557 279,-2557 ; 257,-2556 279,-2556 ; 258,-2555 279,-2555 ; 259,-2554 279,-2554 ; 259,-2553 279,-2553 ; 260,-2552 279,-2552 ; 260,-2551 279,-2551 ; 260,-2550 279,-2550 ; 260,-2549 279,-2549 ; 260,-2548 279,-2548 ; 260,-2547 279,-2547 ; 261,-2546 279,-2546 ; 261,-2545 279,-2545 ; 261,-2544 279,-2544 ; 261,-2543 279,-2543 ; 261,-2542 279,-2542 ; 261,-2541 279,-2541 ; 261,-2540 279,-2540 ; 261,-2539 279,-2539 ; 261,-2538 279,-2538 ; 261,-2537 279,-2537 ; 261,-2536 279,-2536 ; 261,-2535 279,-2535 ; 261,-2534 279,-2534 ; 261,-2533 279,-2533 ; 261,-2532 279,-2532 ; 261,-2531 279,-2531 ; 261,-2530 279,-2530 ; 261,-2529 279,-2529 ; 261,-2528 279,-2528 ; 261,-2527 279,-2527 ; 261,-2526 279,-2526 ; 261,-2525 279,-2525 ; 261,-2524 279,-2524 ; 261,-2523 279,-2523 ; 261,-2522 279,-2522 ; 261,-2521 279,-2521 ; 261,-2520 279,-2520 ; 261,-2519 279,-2519 ; 261,-2518 279,-2518 ; 261,-2517 279,-2517 ; 261,-2516 279,-2516 ; 261,-2515 279,-2515 ; 261,-2514 279,-2514 ; 261,-2513 279,-2513 ; 261,-2512 279,-2512 ; 261,-2511 279,-2511 ; 261,-2510 279,-2510 ; 261,-2509 279,-2509 ; 261,-2508 279,-2508 ; 261,-2507 279,-2507 ; 261,-2506 279,-2506 ; 261,-2505 279,-2505 ; 261,-2504 279,-2504 ; 261,-2503 279,-2503 ; 261,-2485 279,-2485 ; 261,-2484 279,-2484 ; 261,-2483 279,-2483 ; 261,-2482 279,-2482 ; 261,-2481 279,-2481 ; 261,-2480 279,-2480 ; 261,-2479 279,-2479 ; 261,-2478 279,-2478 ; 261,-2477 279,-2477 ; 261,-2476 279,-2476 ; 261,-2475 279,-2475 ; 261,-2474 279,-2474 ; 261,-2473 279,-2473 ; 261,-2472 279,-2472 ; 261,-2471 279,-2471 ; 261,-2470 279,-2470 ; 261,-2469 279,-2469 ; 261,-2468 279,-2468 ; 261,-2467 279,-2467 ; 261,-2466 279,-2466 ; 261,-2465 279,-2465 ; 261,-2464 279,-2464 ; 261,-2463 279,-2463 ; 261,-2462 279,-2462 ; 261,-2461 279,-2461 ; 261,-2460 279,-2460 ; 261,-2459 279,-2459 ; 261,-2458 279,-2458 ; 261,-2457 279,-2457 ; 261,-2456 279,-2456 ; 261,-2455 279,-2455 ; 261,-2454 279,-2454 ; 261,-2453 279,-2453 ; 261,-2452 279,-2452 ; 261,-2451 279,-2451 ; 261,-2450 279,-2450 ; 261,-2449 279,-2449 ; 261,-2448 279,-2448 ; 261,-2447 279,-2447 ; 261,-2446 279,-2446 ; 261,-2445 279,-2445 ; 261,-2444 279,-2444 ; 261,-2443 279,-2443 ; 261,-2442 279,-2442 ; 261,-2424 279,-2424 ; 261,-2423 279,-2423 ; 261,-2422 279,-2422 ; 261,-2421 279,-2421 ; 261,-2420 279,-2420 ; 261,-2419 279,-2419 ; 261,-2418 279,-2418 ; 261,-2417 279,-2417 ; 261,-2416 279,-2416 ; 261,-2415 279,-2415 ; 261,-2414 279,-2414 ; 261,-2413 279,-2413 ; 261,-2412 279,-2412 ; 261,-2411 279,-2411 ; 261,-2410 279,-2410 ; 261,-2409 279,-2409 ; 261,-2408 279,-2408 ; 261,-2407 279,-2407 ; 261,-2406 279,-2406 ; 261,-2405 279,-2405 ; 261,-2404 279,-2404 ; 261,-2403 279,-2403 ; 261,-2402 279,-2402 ; 261,-2401 279,-2401 ; 261,-2400 279,-2400 ; 261,-2399 279,-2399 ; 261,-2398 279,-2398 ; 261,-2397 279,-2397 ; 261,-2396 279,-2396 ; 261,-2395 279,-2395 ; 261,-2394 279,-2394 ; 261,-2393 279,-2393 ; 261,-2392 279,-2392 ; 261,-2391 279,-2391 ; 261,-2390 279,-2390 ; 261,-2389 279,-2389 ; 261,-2388 279,-2388 ; 261,-2387 279,-2387 ; 261,-2386 279,-2386 ; 261,-2385 279,-2385 ; 261,-2384 279,-2384 ; 261,-2383 279,-2383 ; 261,-2382 279,-2382 ; 261,-2381 279,-2381 ; 298,-2450 316,-2450 ; 298,-2449 316,-2449 ; 298,-2448 317,-2448 ; 299,-2451 316,-2451 ; 299,-2447 317,-2447 ; 299,-2446 317,-2446 ; 300,-2452 315,-2452 ; 300,-2445 318,-2445 ; 300,-2444 318,-2444 ; 300,-2443 318,-2443 ; 301,-2495 344,-2495 ; 301,-2494 363,-2494 ; 301,-2493 363,-2493 ; 301,-2492 363,-2492 ; 301,-2491 363,-2491 ; 301,-2442 318,-2442 ; 301,-2441 319,-2441 ; 301,-2440 319,-2440 ; 302,-2500 330,-2500 ; 302,-2499 333,-2499 ; 302,-2498 335,-2498 ; 302,-2497 338,-2497 ; 302,-2496 341,-2496 ; 302,-2490 363,-2490 ; 302,-2453 315,-2453 ; 302,-2439 319,-2439 ; 302,-2438 320,-2438 ; 302,-2437 320,-2437 ; 303,-2506 313,-2506 ; 303,-2505 316,-2505 ; 303,-2504 319,-2504 ; 303,-2503 322,-2503 ; 303,-2502 324,-2502 ; 303,-2501 327,-2501 ; 303,-2454 315,-2454 ; 303,-2436 320,-2436 ; 303,-2435 320,-2435 ; 303,-2434 321,-2434 ; 304,-2509 305,-2509 ; 304,-2508 308,-2508 ; 304,-2507 311,-2507 ; 304,-2433 321,-2433 ; 304,-2432 321,-2432 ; 304,-2431 321,-2431 ; 305,-2489 363,-2489 ; 305,-2455 314,-2455 ; 305,-2430 322,-2430 ; 305,-2429 322,-2429 ; 305,-2428 322,-2428 ; 305,-2427 322,-2427 ; 306,-2456 314,-2456 ; 306,-2426 323,-2426 ; 306,-2425 323,-2425 ; 306,-2424 323,-2424 ; 306,-2423 323,-2423 ; 307,-2422 324,-2422 ; 307,-2421 324,-2421 ; 307,-2420 386,-2420 ; 307,-2419 386,-2419 ; 308,-2488 363,-2488 ; 308,-2457 314,-2457 ; 308,-2418 386,-2418 ; 308,-2417 386,-2417 ; 308,-2416 386,-2416 ; 308,-2415 386,-2415 ; 309,-2458 313,-2458 ; 309,-2414 386,-2414 ; 309,-2413 386,-2413 ; 309,-2412 386,-2412 ; 309,-2411 386,-2411 ; 309,-2410 386,-2410 ; 310,-2409 386,-2409 ; 310,-2408 386,-2408 ; 310,-2407 386,-2407 ; 310,-2406 386,-2406 ; 310,-2405 386,-2405 ; 310,-2404 327,-2404 ; 311,-2487 365,-2487 ; 311,-2459 313,-2459 ; 311,-2403 327,-2403 ; 311,-2402 327,-2402 ; 311,-2401 327,-2401 ; 311,-2400 328,-2400 ; 311,-2399 328,-2399 ; 311,-2398 328,-2398 ; 312,-2460 313,-2460 ; 312,-2397 328,-2397 ; 312,-2396 328,-2396 ; 312,-2395 328,-2395 ; 312,-2394 329,-2394 ; 312,-2393 329,-2393 ; 312,-2392 329,-2392 ; 312,-2391 329,-2391 ; 313,-2390 329,-2390 ; 313,-2389 329,-2389 ; 313,-2388 329,-2388 ; 313,-2387 330,-2387 ; 313,-2386 330,-2386 ; 313,-2385 330,-2385 ; 313,-2384 330,-2384 ; 313,-2383 330,-2383 ; 313,-2382 330,-2382 ; 314,-2486 368,-2486 ; 314,-2381 330,-2381 ; 314,-2380 330,-2380 ; 314,-2379 331,-2379 ; 314,-2378 331,-2378 ; 314,-2377 331,-2377 ; 314,-2376 329,-2376 ; 314,-2375 323,-2375 ; 314,-2374 317,-2374 ; 317,-2485 370,-2485 ; 320,-2484 373,-2484 ; 323,-2483 376,-2483 ; 326,-2482 379,-2482 ; 329,-2481 382,-2481 ; 332,-2480 384,-2480 ; 335,-2479 387,-2479 ; 338,-2478 389,-2478 ; 340,-2477 388,-2477 ; 343,-2476 388,-2476 ; 345,-2580 363,-2580 ; 345,-2579 363,-2579 ; 345,-2578 363,-2578 ; 345,-2577 363,-2577 ; 345,-2576 363,-2576 ; 345,-2575 363,-2575 ; 345,-2574 363,-2574 ; 345,-2573 363,-2573 ; 345,-2572 363,-2572 ; 345,-2571 363,-2571 ; 345,-2570 363,-2570 ; 345,-2569 363,-2569 ; 345,-2568 363,-2568 ; 345,-2567 363,-2567 ; 345,-2566 363,-2566 ; 345,-2565 363,-2565 ; 345,-2564 363,-2564 ; 345,-2563 363,-2563 ; 345,-2562 363,-2562 ; 345,-2561 363,-2561 ; 345,-2560 363,-2560 ; 345,-2559 363,-2559 ; 345,-2558 363,-2558 ; 345,-2557 363,-2557 ; 345,-2556 363,-2556 ; 345,-2555 363,-2555 ; 345,-2554 363,-2554 ; 345,-2553 363,-2553 ; 345,-2552 363,-2552 ; 345,-2551 363,-2551 ; 345,-2550 363,-2550 ; 345,-2549 363,-2549 ; 345,-2548 363,-2548 ; 345,-2547 363,-2547 ; 345,-2546 363,-2546 ; 345,-2545 363,-2545 ; 345,-2544 363,-2544 ; 345,-2543 363,-2543 ; 345,-2542 363,-2542 ; 345,-2541 363,-2541 ; 345,-2540 363,-2540 ; 345,-2539 363,-2539 ; 345,-2538 363,-2538 ; 345,-2537 363,-2537 ; 345,-2536 363,-2536 ; 345,-2535 363,-2535 ; 345,-2534 363,-2534 ; 345,-2533 363,-2533 ; 345,-2532 363,-2532 ; 345,-2531 363,-2531 ; 345,-2530 363,-2530 ; 345,-2529 363,-2529 ; 345,-2528 363,-2528 ; 345,-2527 363,-2527 ; 345,-2526 363,-2526 ; 345,-2525 363,-2525 ; 345,-2524 363,-2524 ; 345,-2523 363,-2523 ; 345,-2522 363,-2522 ; 345,-2521 363,-2521 ; 345,-2520 363,-2520 ; 345,-2519 363,-2519 ; 345,-2518 363,-2518 ; 345,-2517 363,-2517 ; 345,-2516 363,-2516 ; 345,-2515 363,-2515 ; 345,-2514 363,-2514 ; 345,-2513 363,-2513 ; 345,-2512 363,-2512 ; 345,-2511 363,-2511 ; 345,-2510 363,-2510 ; 345,-2509 363,-2509 ; 345,-2508 363,-2508 ; 345,-2507 363,-2507 ; 345,-2506 363,-2506 ; 345,-2505 363,-2505 ; 345,-2504 363,-2504 ; 345,-2503 363,-2503 ; 345,-2502 363,-2502 ; 345,-2501 363,-2501 ; 345,-2500 363,-2500 ; 345,-2499 363,-2499 ; 345,-2498 363,-2498 ; 345,-2497 363,-2497 ; 345,-2496 363,-2496 ; 345,-2495 363,-2495 ; 345,-2475 388,-2475 ; 345,-2474 388,-2474 ; 345,-2473 388,-2473 ; 345,-2472 388,-2472 ; 345,-2471 387,-2471 ; 345,-2470 387,-2470 ; 345,-2469 387,-2469 ; 345,-2468 363,-2468 ; 345,-2467 363,-2467 ; 345,-2466 363,-2466 ; 345,-2465 363,-2465 ; 345,-2464 363,-2464 ; 345,-2463 363,-2463 ; 345,-2462 363,-2462 ; 345,-2461 363,-2461 ; 345,-2460 363,-2460 ; 345,-2459 363,-2459 ; 345,-2458 363,-2458 ; 345,-2457 363,-2457 ; 345,-2456 363,-2456 ; 345,-2455 363,-2455 ; 345,-2454 363,-2454 ; 345,-2453 363,-2453 ; 345,-2452 363,-2452 ; 345,-2451 363,-2451 ; 345,-2450 363,-2450 ; 345,-2449 363,-2449 ; 345,-2448 363,-2448 ; 345,-2447 363,-2447 ; 345,-2446 363,-2446 ; 345,-2445 363,-2445 ; 345,-2444 363,-2444 ; 345,-2443 363,-2443 ; 345,-2442 363,-2442 ; 345,-2441 363,-2441 ; 345,-2440 363,-2440 ; 345,-2439 363,-2439 ; 345,-2438 363,-2438 ; 345,-2437 363,-2437 ; 345,-2436 363,-2436 ; 345,-2435 363,-2435 ; 345,-2434 363,-2434 ; 345,-2433 363,-2433 ; 345,-2432 363,-2432 ; 345,-2431 363,-2431 ; 345,-2430 363,-2430 ; 345,-2429 363,-2429 ; 345,-2428 363,-2428 ; 345,-2427 363,-2427 ; 345,-2426 363,-2426 ; 345,-2425 363,-2425 ; 345,-2424 363,-2424 ; 345,-2423 363,-2423 ; 345,-2422 363,-2422 ; 345,-2421 363,-2421 ; 345,-2404 363,-2404 ; 345,-2403 363,-2403 ; 345,-2402 363,-2402 ; 345,-2401 363,-2401 ; 345,-2400 363,-2400 ; 345,-2399 363,-2399 ; 345,-2398 363,-2398 ; 345,-2397 363,-2397 ; 345,-2396 363,-2396 ; 345,-2395 363,-2395 ; 345,-2394 363,-2394 ; 345,-2393 363,-2393 ; 345,-2392 363,-2392 ; 345,-2391 363,-2391 ; 345,-2390 363,-2390 ; 345,-2389 363,-2389 ; 345,-2388 363,-2388 ; 345,-2387 363,-2387 ; 345,-2386 363,-2386 ; 345,-2385 363,-2385 ; 345,-2384 363,-2384 ; 345,-2383 363,-2383 ; 345,-2382 363,-2382 ; 345,-2381 363,-2381 ; 345,-2380 363,-2380 ; 345,-2379 363,-2379 ; 345,-2378 363,-2378 ; 345,-2377 363,-2377 ; 345,-2376 363,-2376 ; 345,-2375 363,-2375 ; 345,-2374 363,-2374 ; 345,-2373 363,-2373 ; 345,-2372 363,-2372 ; 345,-2371 363,-2371 ; 345,-2370 363,-2370 ; 345,-2369 363,-2369 ; 345,-2368 363,-2368 ; 345,-2367 363,-2367 ; 345,-2366 363,-2366 ; 345,-2365 363,-2365 ; 345,-2364 363,-2364 ; 345,-2363 363,-2363 ; 345,-2362 363,-2362 ; 345,-2361 363,-2361 ; 345,-2360 363,-2360 ; 345,-2359 363,-2359 ; 345,-2358 363,-2358 ; 345,-2357 363,-2357 ; 345,-2356 363,-2356 ; 345,-2355 363,-2355 ; 345,-2354 363,-2354 ; 345,-2353 363,-2353 ; 345,-2352 363,-2352 ; 366,-2468 387,-2468 ; 369,-2467 387,-2467 ; 371,-2466 387,-2466 ; 374,-2465 387,-2465 ; 377,-2519 402,-2519 ; 377,-2464 386,-2464 ; 377,-2442 397,-2442 ; 378,-2520 401,-2520 ; 378,-2518 403,-2518 ; 378,-2443 397,-2443 ; 378,-2441 398,-2441 ; 379,-2521 400,-2521 ; 379,-2517 404,-2517 ; 379,-2463 386,-2463 ; 379,-2440 398,-2440 ; 379,-2439 399,-2439 ; 380,-2522 400,-2522 ; 380,-2516 405,-2516 ; 380,-2444 396,-2444 ; 380,-2438 400,-2438 ; 381,-2523 399,-2523 ; 381,-2515 406,-2515 ; 381,-2445 396,-2445 ; 381,-2437 400,-2437 ; 381,-2436 401,-2436 ; 382,-2524 398,-2524 ; 382,-2514 407,-2514 ; 382,-2462 386,-2462 ; 382,-2435 401,-2435 ; 382,-2434 402,-2434 ; 383,-2526 396,-2526 ; 383,-2525 397,-2525 ; 383,-2513 408,-2513 ; 383,-2446 395,-2446 ; 383,-2433 402,-2433 ; 384,-2527 395,-2527 ; 384,-2512 408,-2512 ; 384,-2432 403,-2432 ; 384,-2431 403,-2431 ; 385,-2528 394,-2528 ; 385,-2511 409,-2511 ; 385,-2461 386,-2461 ; 385,-2447 394,-2447 ; 385,-2430 404,-2430 ; 385,-2429 404,-2429 ; 386,-2529 393,-2529 ; 386,-2510 410,-2510 ; 386,-2448 394,-2448 ; 386,-2428 405,-2428 ; 386,-2427 405,-2427 ; 387,-2530 391,-2530 ; 387,-2509 411,-2509 ; 387,-2426 406,-2426 ; 387,-2425 406,-2425 ; 388,-2531 390,-2531 ; 388,-2508 412,-2508 ; 388,-2449 393,-2449 ; 388,-2424 407,-2424 ; 389,-2507 412,-2507 ; 389,-2423 407,-2423 ; 389,-2422 408,-2422 ; 390,-2506 413,-2506 ; 390,-2450 393,-2450 ; 390,-2421 408,-2421 ; 390,-2420 409,-2420 ; 391,-2505 414,-2505 ; 391,-2451 392,-2451 ; 391,-2419 409,-2419 ; 391,-2418 410,-2418 ; 392,-2504 415,-2504 ; 392,-2417 410,-2417 ; 392,-2416 411,-2416 ; 393,-2562 423,-2562 ; 393,-2503 415,-2503 ; 393,-2415 411,-2415 ; 393,-2414 412,-2414 ; 394,-2563 422,-2563 ; 394,-2561 424,-2561 ; 394,-2502 416,-2502 ; 394,-2413 412,-2413 ; 394,-2412 413,-2412 ; 395,-2564 421,-2564 ; 395,-2560 425,-2560 ; 395,-2501 417,-2501 ; 395,-2411 413,-2411 ; 395,-2410 414,-2410 ; 396,-2565 419,-2565 ; 396,-2500 418,-2500 ; 396,-2409 414,-2409 ; 396,-2408 414,-2408 ; 397,-2567 417,-2567 ; 397,-2566 418,-2566 ; 397,-2559 426,-2559 ; 397,-2499 418,-2499 ; 397,-2498 419,-2498 ; 397,-2407 415,-2407 ; 397,-2406 415,-2406 ; 398,-2568 416,-2568 ; 398,-2558 427,-2558 ; 398,-2497 420,-2497 ; 398,-2405 524,-2405 ; 398,-2404 524,-2404 ; 398,-2403 524,-2403 ; 399,-2569 414,-2569 ; 399,-2557 428,-2557 ; 399,-2496 420,-2496 ; 399,-2402 524,-2402 ; 399,-2401 524,-2401 ; 400,-2570 413,-2570 ; 400,-2495 421,-2495 ; 400,-2400 524,-2400 ; 400,-2399 524,-2399 ; 401,-2572 411,-2572 ; 401,-2571 412,-2571 ; 401,-2556 429,-2556 ; 401,-2494 422,-2494 ; 401,-2398 524,-2398 ; 401,-2397 524,-2397 ; 402,-2573 409,-2573 ; 402,-2555 430,-2555 ; 402,-2493 422,-2493 ; 402,-2492 423,-2492 ; 402,-2396 524,-2396 ; 402,-2395 524,-2395 ; 402,-2394 525,-2394 ; 403,-2574 408,-2574 ; 403,-2554 431,-2554 ; 403,-2491 424,-2491 ; 403,-2393 525,-2393 ; 403,-2392 525,-2392 ; 404,-2576 405,-2576 ; 404,-2575 407,-2575 ; 404,-2553 432,-2553 ; 404,-2490 424,-2490 ; 404,-2391 525,-2391 ; 404,-2390 525,-2390 ; 405,-2489 425,-2489 ; 405,-2488 425,-2488 ; 405,-2389 423,-2389 ; 405,-2388 424,-2388 ; 405,-2387 424,-2387 ; 406,-2552 433,-2552 ; 406,-2487 426,-2487 ; 406,-2386 424,-2386 ; 406,-2385 425,-2385 ; 407,-2551 434,-2551 ; 407,-2486 427,-2486 ; 407,-2485 427,-2485 ; 407,-2384 425,-2384 ; 407,-2383 426,-2383 ; 407,-2382 426,-2382 ; 408,-2550 435,-2550 ; 408,-2484 428,-2484 ; 408,-2381 426,-2381 ; 408,-2380 427,-2380 ; 409,-2549 436,-2549 ; 409,-2483 428,-2483 ; 409,-2482 429,-2482 ; 409,-2379 427,-2379 ; 409,-2378 428,-2378 ; 409,-2377 428,-2377 ; 410,-2548 437,-2548 ; 410,-2481 429,-2481 ; 410,-2376 428,-2376 ; 410,-2375 429,-2375 ; 411,-2480 430,-2480 ; 411,-2479 430,-2479 ; 411,-2374 429,-2374 ; 411,-2373 429,-2373 ; 411,-2372 430,-2372 ; 412,-2547 438,-2547 ; 412,-2478 431,-2478 ; 412,-2477 431,-2477 ; 412,-2371 430,-2371 ; 412,-2370 431,-2370 ; 412,-2369 431,-2369 ; 413,-2546 439,-2546 ; 413,-2476 432,-2476 ; 413,-2368 431,-2368 ; 413,-2367 432,-2367 ; 414,-2545 440,-2545 ; 414,-2475 432,-2475 ; 414,-2474 433,-2474 ; 414,-2366 432,-2366 ; 414,-2365 433,-2365 ; 414,-2364 433,-2364 ; 415,-2544 441,-2544 ; 415,-2473 433,-2473 ; 415,-2472 434,-2472 ; 415,-2363 433,-2363 ; 415,-2362 434,-2362 ; 415,-2361 434,-2361 ; 416,-2543 442,-2543 ; 416,-2471 434,-2471 ; 416,-2470 434,-2470 ; 416,-2360 434,-2360 ; 416,-2359 435,-2359 ; 416,-2358 435,-2358 ; 417,-2542 442,-2542 ; 417,-2469 435,-2469 ; 417,-2468 435,-2468 ; 417,-2357 435,-2357 ; 417,-2356 436,-2356 ; 417,-2355 436,-2355 ; 418,-2541 443,-2541 ; 418,-2467 436,-2467 ; 418,-2466 436,-2466 ; 418,-2354 434,-2354 ; 418,-2353 431,-2353 ; 418,-2352 427,-2352 ; 419,-2540 444,-2540 ; 419,-2465 436,-2465 ; 419,-2464 437,-2464 ; 419,-2463 437,-2463 ; 419,-2351 424,-2351 ; 419,-2350 421,-2350 ; 420,-2539 445,-2539 ; 420,-2462 437,-2462 ; 420,-2461 438,-2461 ; 421,-2538 446,-2538 ; 421,-2460 438,-2460 ; 421,-2459 438,-2459 ; 421,-2458 439,-2458 ; 422,-2537 446,-2537 ; 422,-2457 439,-2457 ; 422,-2456 439,-2456 ; 422,-2455 440,-2455 ; 423,-2536 447,-2536 ; 423,-2454 440,-2454 ; 423,-2453 440,-2453 ; 424,-2535 448,-2535 ; 424,-2452 440,-2452 ; 424,-2451 441,-2451 ; 424,-2450 441,-2450 ; 424,-2449 441,-2449 ; 425,-2534 449,-2534 ; 425,-2448 442,-2448 ; 425,-2447 442,-2447 ; 425,-2446 442,-2446 ; 426,-2533 450,-2533 ; 426,-2445 442,-2445 ; 426,-2444 443,-2444 ; 426,-2443 443,-2443 ; 426,-2442 443,-2442 ; 427,-2532 450,-2532 ; 427,-2441 443,-2441 ; 427,-2440 444,-2440 ; 427,-2439 444,-2439 ; 427,-2438 444,-2438 ; 428,-2531 451,-2531 ; 428,-2437 444,-2437 ; 428,-2436 445,-2436 ; 428,-2435 445,-2435 ; 428,-2434 445,-2434 ; 429,-2530 452,-2530 ; 429,-2529 452,-2529 ; 429,-2433 445,-2433 ; 429,-2432 445,-2432 ; 429,-2431 446,-2431 ; 429,-2430 446,-2430 ; 429,-2429 446,-2429 ; 430,-2528 453,-2528 ; 430,-2428 446,-2428 ; 430,-2427 446,-2427 ; 430,-2426 447,-2426 ; 430,-2425 447,-2425 ; 430,-2424 447,-2424 ; 431,-2527 454,-2527 ; 431,-2423 447,-2423 ; 431,-2422 447,-2422 ; 431,-2421 448,-2421 ; 431,-2420 448,-2420 ; 431,-2419 448,-2419 ; 431,-2418 448,-2418 ; 432,-2526 454,-2526 ; 432,-2417 448,-2417 ; 432,-2416 448,-2416 ; 432,-2415 449,-2415 ; 432,-2414 449,-2414 ; 432,-2413 449,-2413 ; 432,-2412 449,-2412 ; 432,-2411 449,-2411 ; 432,-2410 449,-2410 ; 433,-2525 455,-2525 ; 433,-2409 450,-2409 ; 433,-2408 450,-2408 ; 433,-2407 450,-2407 ; 433,-2406 450,-2406 ; 434,-2524 456,-2524 ; 434,-2523 456,-2523 ; 435,-2522 457,-2522 ; 436,-2521 458,-2521 ; 437,-2520 458,-2520 ; 437,-2519 459,-2519 ; 438,-2518 459,-2518 ; 439,-2517 460,-2517 ; 440,-2516 460,-2516 ; 440,-2515 461,-2515 ; 441,-2514 462,-2514 ; 442,-2513 462,-2513 ; 442,-2512 463,-2512 ; 443,-2511 463,-2511 ; 443,-2510 464,-2510 ; 444,-2509 464,-2509 ; 445,-2508 465,-2508 ; 445,-2507 465,-2507 ; 446,-2558 510,-2558 ; 446,-2557 511,-2557 ; 446,-2556 511,-2556 ; 446,-2555 512,-2555 ; 446,-2554 464,-2554 ; 446,-2553 451,-2553 ; 446,-2506 466,-2506 ; 446,-2505 466,-2505 ; 447,-2563 506,-2563 ; 447,-2562 507,-2562 ; 447,-2561 508,-2561 ; 447,-2560 509,-2560 ; 447,-2559 509,-2559 ; 447,-2504 467,-2504 ; 448,-2570 495,-2570 ; 448,-2569 498,-2569 ; 448,-2568 500,-2568 ; 448,-2567 501,-2567 ; 448,-2566 503,-2566 ; 448,-2565 504,-2565 ; 448,-2564 505,-2564 ; 448,-2503 467,-2503 ; 448,-2502 467,-2502 ; 449,-2571 492,-2571 ; 449,-2501 468,-2501 ; 449,-2500 468,-2500 ; 450,-2499 469,-2499 ; 450,-2498 469,-2498 ; 451,-2497 469,-2497 ; 451,-2496 470,-2496 ; 452,-2495 470,-2495 ; 452,-2494 471,-2494 ; 452,-2493 471,-2493 ; 453,-2492 471,-2492 ; 453,-2491 472,-2491 ; 454,-2572 487,-2572 ; 454,-2490 472,-2490 ; 454,-2489 472,-2489 ; 455,-2488 473,-2488 ; 455,-2487 473,-2487 ; 455,-2486 473,-2486 ; 456,-2485 474,-2485 ; 456,-2484 474,-2484 ; 456,-2483 474,-2483 ; 457,-2482 474,-2482 ; 457,-2481 475,-2481 ; 457,-2480 475,-2480 ; 458,-2479 475,-2479 ; 458,-2478 476,-2478 ; 458,-2477 476,-2477 ; 459,-2476 476,-2476 ; 459,-2475 476,-2475 ; 459,-2474 477,-2474 ; 460,-2473 477,-2473 ; 460,-2472 477,-2472 ; 460,-2471 477,-2471 ; 461,-2470 478,-2470 ; 461,-2469 478,-2469 ; 461,-2468 478,-2468 ; 461,-2467 478,-2467 ; 462,-2466 479,-2466 ; 462,-2465 479,-2465 ; 462,-2464 479,-2464 ; 462,-2463 479,-2463 ; 463,-2462 479,-2462 ; 463,-2461 480,-2461 ; 463,-2460 480,-2460 ; 463,-2459 480,-2459 ; 464,-2458 480,-2458 ; 464,-2457 481,-2457 ; 464,-2456 481,-2456 ; 464,-2455 481,-2455 ; 464,-2454 481,-2454 ; 465,-2453 481,-2453 ; 465,-2452 482,-2452 ; 465,-2451 482,-2451 ; 465,-2450 482,-2450 ; 465,-2449 482,-2449 ; 466,-2448 482,-2448 ; 466,-2447 482,-2447 ; 466,-2446 483,-2446 ; 466,-2445 483,-2445 ; 466,-2444 483,-2444 ; 466,-2443 483,-2443 ; 467,-2442 483,-2442 ; 467,-2441 483,-2441 ; 467,-2440 484,-2440 ; 467,-2439 484,-2439 ; 467,-2438 484,-2438 ; 467,-2437 484,-2437 ; 468,-2436 484,-2436 ; 468,-2435 484,-2435 ; 468,-2434 485,-2434 ; 468,-2433 485,-2433 ; 468,-2432 485,-2432 ; 468,-2431 485,-2431 ; 468,-2430 485,-2430 ; 469,-2429 485,-2429 ; 469,-2428 485,-2428 ; 469,-2427 486,-2427 ; 469,-2426 486,-2426 ; 469,-2425 486,-2425 ; 469,-2424 486,-2424 ; 469,-2423 486,-2423 ; 469,-2422 486,-2422 ; 469,-2421 486,-2421 ; 470,-2420 486,-2420 ; 470,-2419 487,-2419 ; 470,-2418 487,-2418 ; 470,-2417 487,-2417 ; 470,-2416 487,-2416 ; 470,-2415 487,-2415 ; 470,-2414 487,-2414 ; 470,-2413 487,-2413 ; 470,-2412 487,-2412 ; 470,-2411 488,-2411 ; 471,-2410 488,-2410 ; 471,-2409 488,-2409 ; 471,-2408 488,-2408 ; 471,-2407 488,-2407 ; 471,-2406 488,-2406 ; 483,-2554 512,-2554 ; 487,-2553 513,-2553 ; 489,-2552 513,-2552 ; 490,-2551 514,-2551 ; 492,-2550 514,-2550 ; 493,-2549 514,-2549 ; 493,-2548 515,-2548 ; 494,-2547 515,-2547 ; 495,-2546 515,-2546 ; 495,-2545 515,-2545 ; 496,-2544 516,-2544 ; 496,-2543 516,-2543 ; 497,-2542 516,-2542 ; 497,-2541 516,-2541 ; 497,-2540 516,-2540 ; 498,-2539 516,-2539 ; 498,-2538 517,-2538 ; 498,-2537 517,-2537 ; 498,-2536 517,-2536 ; 498,-2535 517,-2535 ; 499,-2534 517,-2534 ; 499,-2533 517,-2533 ; 499,-2532 517,-2532 ; 499,-2531 517,-2531 ; 499,-2530 517,-2530 ; 499,-2529 517,-2529 ; 499,-2528 517,-2528 ; 499,-2527 517,-2527 ; 499,-2526 517,-2526 ; 499,-2525 518,-2525 ; 499,-2524 518,-2524 ; 499,-2523 518,-2523 ; 500,-2522 518,-2522 ; 500,-2521 518,-2521 ; 500,-2520 518,-2520 ; 500,-2519 518,-2519 ; 500,-2518 518,-2518 ; 500,-2517 518,-2517 ; 500,-2516 518,-2516 ; 500,-2515 518,-2515 ; 500,-2514 518,-2514 ; 500,-2513 518,-2513 ; 500,-2512 518,-2512 ; 500,-2511 518,-2511 ; 500,-2510 518,-2510 ; 501,-2509 518,-2509 ; 501,-2508 518,-2508 ; 501,-2507 519,-2507 ; 501,-2506 519,-2506 ; 501,-2505 519,-2505 ; 501,-2504 519,-2504 ; 501,-2503 519,-2503 ; 501,-2502 519,-2502 ; 501,-2501 519,-2501 ; 501,-2500 519,-2500 ; 501,-2499 519,-2499 ; 501,-2498 519,-2498 ; 501,-2497 519,-2497 ; 501,-2496 519,-2496 ; 501,-2495 519,-2495 ; 502,-2494 519,-2494 ; 502,-2493 519,-2493 ; 502,-2492 519,-2492 ; 502,-2491 519,-2491 ; 502,-2490 520,-2490 ; 502,-2489 520,-2489 ; 502,-2488 520,-2488 ; 502,-2487 520,-2487 ; 502,-2486 520,-2486 ; 502,-2485 520,-2485 ; 502,-2484 520,-2484 ; 502,-2483 520,-2483 ; 502,-2482 520,-2482 ; 502,-2481 520,-2481 ; 502,-2480 520,-2480 ; 502,-2479 520,-2479 ; 503,-2478 520,-2478 ; 503,-2477 520,-2477 ; 503,-2476 520,-2476 ; 503,-2475 520,-2475 ; 503,-2474 520,-2474 ; 503,-2473 520,-2473 ; 503,-2472 520,-2472 ; 503,-2471 521,-2471 ; 503,-2470 521,-2470 ; 503,-2469 521,-2469 ; 503,-2468 521,-2468 ; 503,-2467 521,-2467 ; 503,-2466 521,-2466 ; 503,-2465 521,-2465 ; 503,-2464 521,-2464 ; 503,-2463 521,-2463 ; 503,-2462 521,-2462 ; 503,-2461 521,-2461 ; 504,-2460 521,-2460 ; 504,-2459 521,-2459 ; 504,-2458 521,-2458 ; 504,-2457 521,-2457 ; 504,-2456 521,-2456 ; 504,-2455 521,-2455 ; 504,-2454 521,-2454 ; 504,-2453 521,-2453 ; 504,-2452 522,-2452 ; 504,-2451 522,-2451 ; 504,-2450 522,-2450 ; 504,-2449 522,-2449 ; 504,-2448 522,-2448 ; 504,-2447 522,-2447 ; 504,-2446 522,-2446 ; 504,-2445 522,-2445 ; 504,-2444 522,-2444 ; 504,-2443 522,-2443 ; 504,-2442 522,-2442 ; 505,-2441 522,-2441 ; 505,-2440 522,-2440 ; 505,-2439 522,-2439 ; 505,-2438 522,-2438 ; 505,-2437 522,-2437 ; 505,-2436 522,-2436 ; 505,-2435 522,-2435 ; 505,-2434 522,-2434 ; 505,-2433 523,-2433 ; 505,-2432 523,-2432 ; 505,-2431 523,-2431 ; 505,-2430 523,-2430 ; 505,-2429 523,-2429 ; 505,-2428 523,-2428 ; 505,-2427 523,-2427 ; 505,-2426 523,-2426 ; 505,-2425 523,-2425 ; 505,-2424 523,-2424 ; 505,-2423 523,-2423 ; 505,-2422 523,-2422 ; 505,-2421 523,-2421 ; 506,-2420 523,-2420 ; 506,-2419 523,-2419 ; 506,-2418 523,-2418 ; 506,-2417 523,-2417 ; 506,-2416 523,-2416 ; 506,-2415 523,-2415 ; 506,-2414 523,-2414 ; 506,-2413 524,-2413 ; 506,-2412 524,-2412 ; 506,-2411 524,-2411 ; 506,-2410 524,-2410 ; 506,-2409 524,-2409 ; 506,-2408 524,-2408 ; 506,-2407 524,-2407 ; 506,-2406 524,-2406 ; 539,-2543 604,-2543 ; 539,-2542 607,-2542 ; 540,-2546 593,-2546 ; 540,-2545 597,-2545 ; 540,-2544 600,-2544 ; 541,-2549 583,-2549 ; 541,-2548 586,-2548 ; 541,-2547 590,-2547 ; 541,-2541 611,-2541 ; 542,-2552 573,-2552 ; 542,-2551 576,-2551 ; 542,-2550 579,-2550 ; 542,-2386 622,-2386 ; 542,-2385 622,-2385 ; 542,-2384 622,-2384 ; 542,-2383 622,-2383 ; 542,-2382 622,-2382 ; 542,-2381 622,-2381 ; 542,-2380 622,-2380 ; 542,-2379 622,-2379 ; 542,-2378 622,-2378 ; 542,-2377 622,-2377 ; 542,-2376 622,-2376 ; 542,-2375 622,-2375 ; 542,-2374 622,-2374 ; 542,-2373 622,-2373 ; 542,-2372 622,-2372 ; 542,-2371 622,-2371 ; 543,-2555 563,-2555 ; 543,-2554 566,-2554 ; 543,-2553 569,-2553 ; 544,-2558 553,-2558 ; 544,-2557 556,-2557 ; 544,-2556 559,-2556 ; 544,-2461 621,-2461 ; 544,-2460 621,-2460 ; 544,-2459 621,-2459 ; 544,-2458 621,-2458 ; 544,-2457 621,-2457 ; 544,-2456 621,-2456 ; 544,-2455 621,-2455 ; 544,-2454 621,-2454 ; 544,-2453 621,-2453 ; 544,-2452 621,-2452 ; 544,-2451 621,-2451 ; 544,-2450 621,-2450 ; 544,-2449 621,-2449 ; 544,-2448 621,-2448 ; 544,-2447 621,-2447 ; 544,-2446 621,-2446 ; 545,-2560 546,-2560 ; 545,-2559 550,-2559 ; 545,-2540 614,-2540 ; 549,-2539 618,-2539 ; 553,-2538 622,-2538 ; 557,-2537 623,-2537 ; 561,-2536 623,-2536 ; 565,-2535 623,-2535 ; 569,-2534 623,-2534 ; 573,-2533 623,-2533 ; 574,-2532 622,-2532 ; 574,-2531 622,-2531 ; 574,-2530 622,-2530 ; 574,-2529 622,-2529 ; 574,-2528 622,-2528 ; 574,-2527 591,-2527 ; 574,-2526 591,-2526 ; 574,-2525 591,-2525 ; 574,-2524 591,-2524 ; 574,-2523 591,-2523 ; 574,-2522 591,-2522 ; 574,-2521 591,-2521 ; 574,-2520 591,-2520 ; 574,-2519 591,-2519 ; 574,-2518 591,-2518 ; 574,-2517 591,-2517 ; 574,-2516 591,-2516 ; 574,-2515 591,-2515 ; 574,-2514 591,-2514 ; 574,-2513 591,-2513 ; 574,-2512 591,-2512 ; 574,-2511 591,-2511 ; 574,-2510 591,-2510 ; 574,-2509 591,-2509 ; 574,-2508 591,-2508 ; 574,-2507 591,-2507 ; 574,-2506 591,-2506 ; 574,-2505 591,-2505 ; 574,-2504 591,-2504 ; 574,-2503 591,-2503 ; 574,-2502 591,-2502 ; 574,-2501 591,-2501 ; 574,-2500 591,-2500 ; 574,-2499 591,-2499 ; 574,-2498 591,-2498 ; 574,-2497 591,-2497 ; 574,-2496 591,-2496 ; 574,-2495 591,-2495 ; 574,-2494 591,-2494 ; 574,-2493 591,-2493 ; 574,-2492 591,-2492 ; 574,-2491 591,-2491 ; 574,-2490 591,-2490 ; 574,-2489 591,-2489 ; 574,-2488 591,-2488 ; 574,-2487 591,-2487 ; 574,-2486 591,-2486 ; 574,-2485 591,-2485 ; 574,-2484 591,-2484 ; 574,-2483 591,-2483 ; 574,-2482 591,-2482 ; 574,-2481 591,-2481 ; 574,-2480 591,-2480 ; 574,-2479 591,-2479 ; 574,-2478 591,-2478 ; 574,-2477 591,-2477 ; 574,-2476 591,-2476 ; 574,-2475 591,-2475 ; 574,-2474 591,-2474 ; 574,-2473 591,-2473 ; 574,-2472 591,-2472 ; 574,-2471 591,-2471 ; 574,-2470 591,-2470 ; 574,-2469 591,-2469 ; 574,-2468 591,-2468 ; 574,-2467 591,-2467 ; 574,-2466 591,-2466 ; 574,-2465 591,-2465 ; 574,-2464 591,-2464 ; 574,-2463 591,-2463 ; 574,-2462 591,-2462 ; 574,-2445 591,-2445 ; 574,-2444 591,-2444 ; 574,-2443 591,-2443 ; 574,-2442 591,-2442 ; 574,-2441 591,-2441 ; 574,-2440 591,-2440 ; 574,-2439 591,-2439 ; 574,-2438 591,-2438 ; 574,-2437 591,-2437 ; 574,-2436 591,-2436 ; 574,-2435 591,-2435 ; 574,-2434 591,-2434 ; 574,-2433 591,-2433 ; 574,-2432 591,-2432 ; 574,-2431 591,-2431 ; 574,-2430 591,-2430 ; 574,-2429 591,-2429 ; 574,-2428 591,-2428 ; 574,-2427 591,-2427 ; 574,-2426 591,-2426 ; 574,-2425 591,-2425 ; 574,-2424 591,-2424 ; 574,-2423 591,-2423 ; 574,-2422 591,-2422 ; 574,-2421 591,-2421 ; 574,-2420 591,-2420 ; 574,-2419 591,-2419 ; 574,-2418 591,-2418 ; 574,-2417 591,-2417 ; 574,-2416 591,-2416 ; 574,-2415 591,-2415 ; 574,-2414 591,-2414 ; 574,-2413 591,-2413